# EAGLE board topshell2.1 (EAGLE 8.1.1)
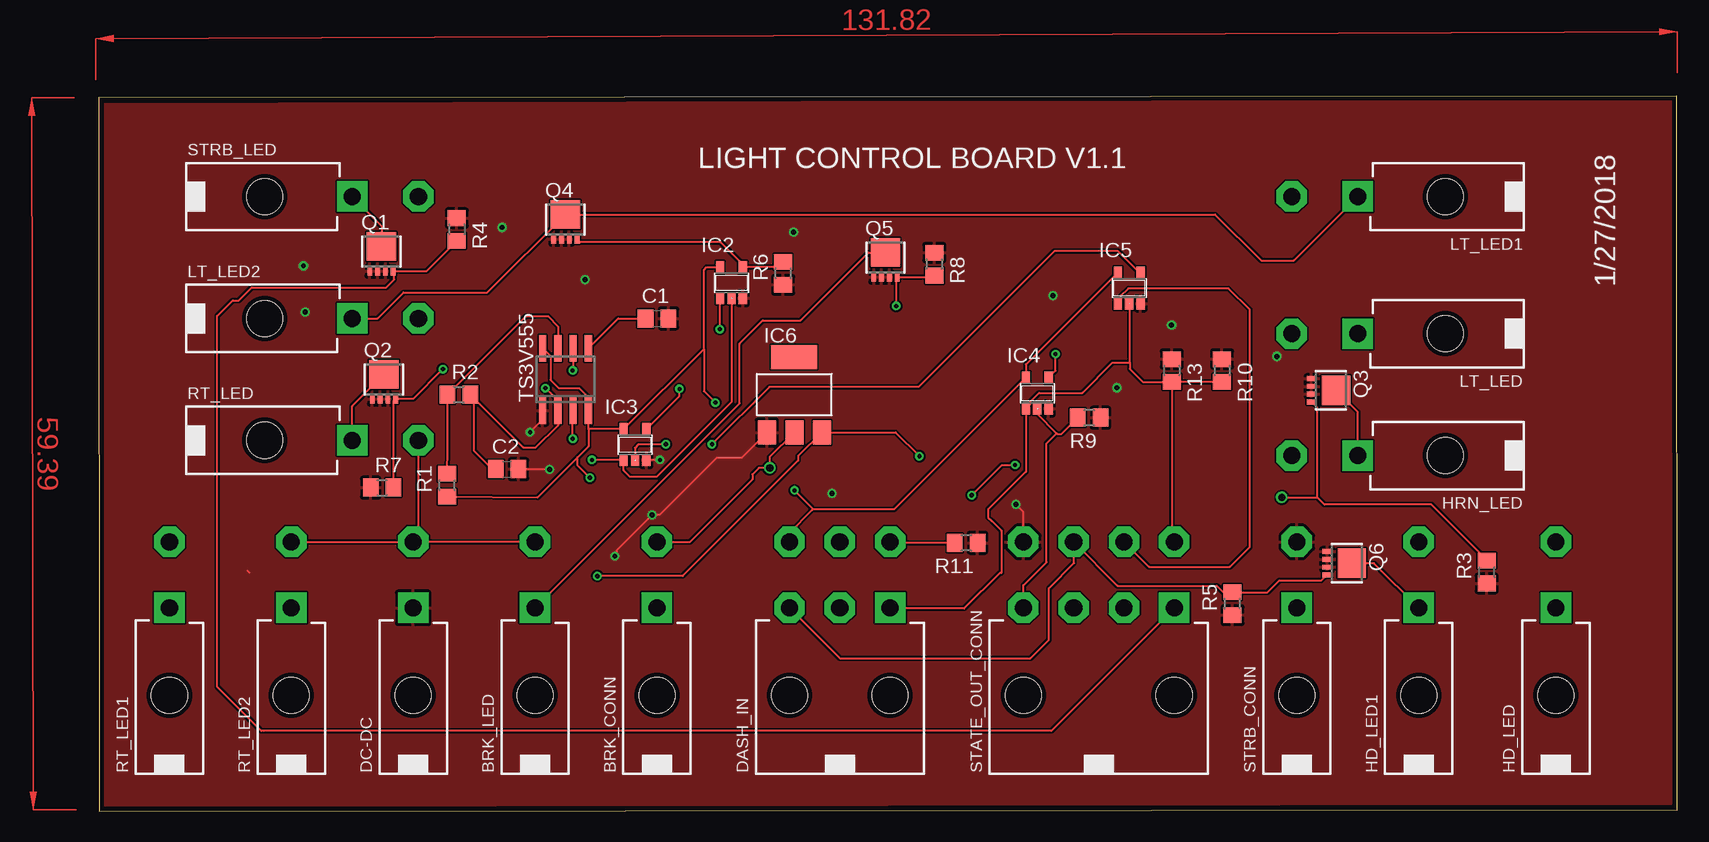
[diagram p0: board, top side]
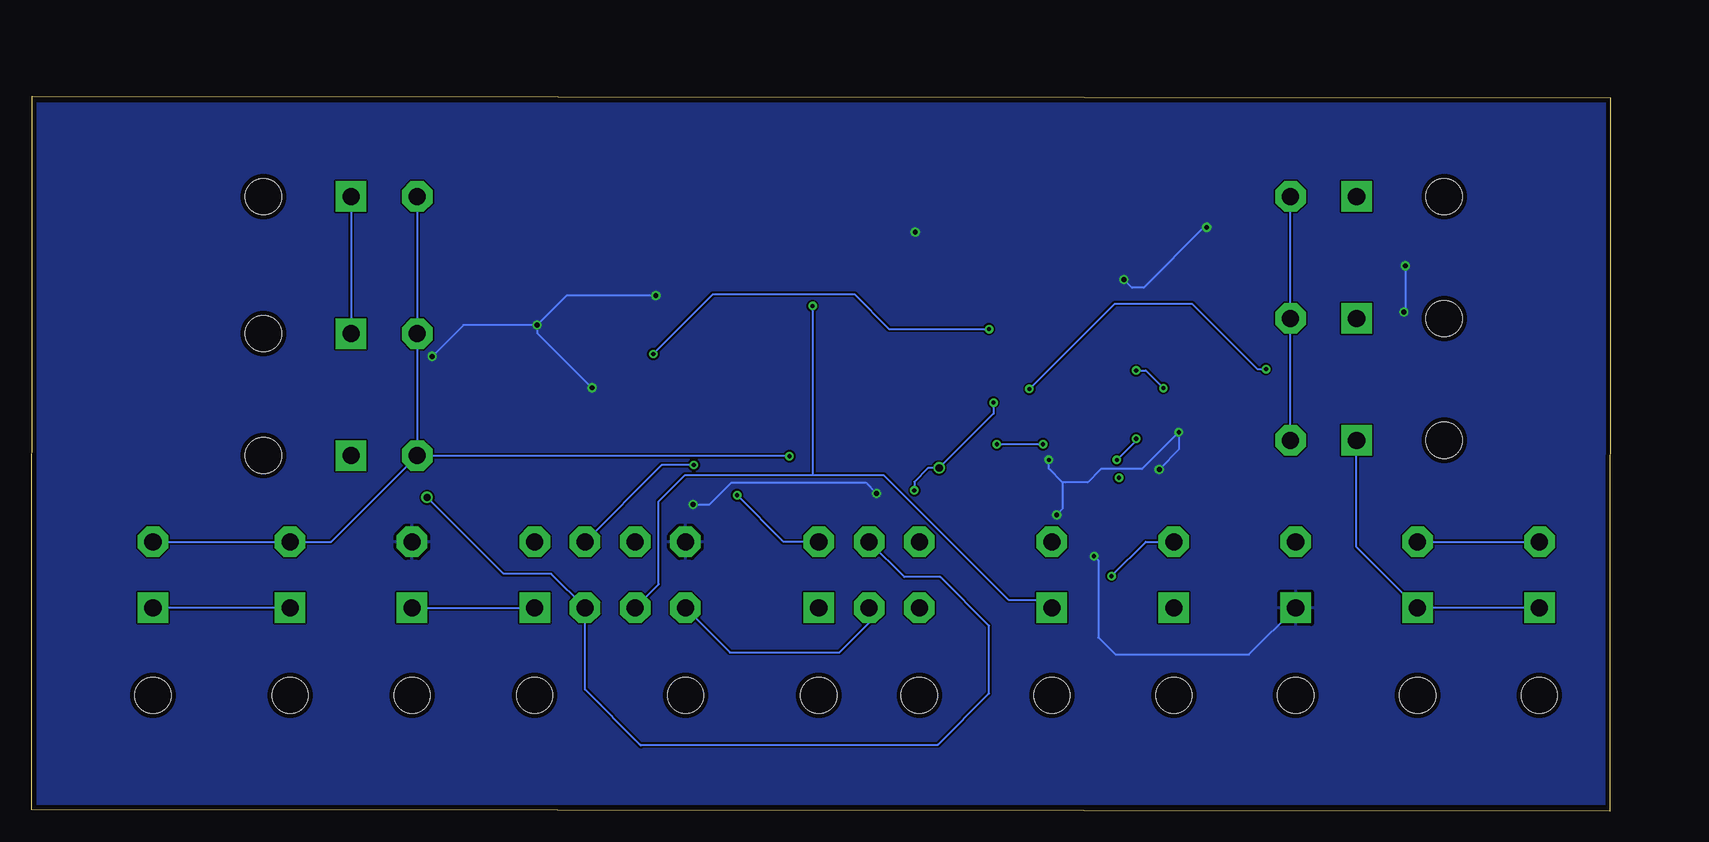
[diagram p1: board, bottom side, seen from below]

Size 131.59 x 59.64 mm. Coordinates in mm from the lower left corner, seen from the top.
Outline: 0.05,0 131.58,0.12 131.54,59.64 0,59.51 0.05,0
Copper layers (1*16): Top 0.0356mm / dielectric 1.5011mm / Bottom 0.0356mm
Design rules "LaenPCBOrder": minimum track width 6mil, minimum drill 13mil, track to track 6mil, track to pad 6mil, pad to pad 6mil, via to via 6mil, smd to smd 6mil, copper to edge 15mil, drill to drill 6mil, minimum pad ring 7mil, minimum via ring 7mil, stop-mask expansion 3mil, vias tented up to drill 0mil, thermal gap 10mil

## Footprints (pad centres in the part's own frame; a part is rotated, then mirrored left to right if it is on the bottom)
39-30-?02? = drill 1.422 pad 2.54 square: 1 0,0 | drill 1.422 pad 2.54 octagon: 2 0,5.512 | hole 3: 0,-7.3
C0805 = smd 1.3 x 1.5: 1 -0.95,0; 2 0.95,0
39-30-?06? = drill 1.422 pad 2.54 square: 1 4.191,0 | drill 1.422 pad 2.54 octagon: 2 0,0; 3 -4.191,0; 4 4.191,5.512; 5 0,5.512; 6 -4.191,5.512 | hole 3: -4.191,-7.3; 4.191,-7.3
SOT23-5 = smd 0.69 x 0.99: 1 -0.95,-1.29; 2 0,-1.29; 3 0.95,-1.29; 4 0.95,1.3; 5 -0.95,1.3
SOT223 = smd 1.499 x 2.007: 1 -2.261,-3.15; 2 0.025,-3.15; 3 2.311,-3.15 | smd 3.81 x 2.007: 4 0,3.15
LFPAK33 = smd 0.4 x 0.8: 1 -0.975,-1.625; 2 -0.325,-1.625; 3 0.325,-1.625; 4 0.975,-1.625 | smd 2.45 x 2.35: MB 0,0.425
R0805 = smd 1.3 x 1.5: 1 -0.95,0; 2 0.95,0
39-30-?08? = drill 1.422 pad 2.54 square: 1 6.287,0 | drill 1.422 pad 2.54 octagon: 2 2.095,0; 3 -2.095,0; 4 -6.287,0; 5 6.287,5.512; 6 2.095,5.512; 7 -2.095,5.512; 8 -6.287,5.512 | hole 3: -6.287,-7.3; 6.287,-7.3
SO08 = smd 0.6 x 2.2: 1 -1.905,-2.6; 2 -0.635,-2.6; 3 0.635,-2.6; 4 1.905,-2.6; 5 1.905,2.6; 6 0.635,2.6; 7 -0.635,2.6; 8 -1.905,2.6

## Placement (x,y rotation side)
BRK_CONN  39-30-02?  [39-30-?02?]  46.54,16.98 0 top
BRK_LED  39-30-02?  [39-30-?02?]  36.38,16.98 0 top
C1  10nF  [C0805]  46.54,41.11 0 top
C2  2.2uF  [C0805]  34.05,28.54 0 top
DASH_IN  39-30-06?  [39-30-?06?]  61.78,16.98 0 top
DC-DC  39-30-02?  [39-30-?02?]  26.22,16.98 0 top
HD_LED  39-30-02?  [39-30-?02?]  121.47,16.98 0 top
HD_LED1  39-30-02?  [39-30-?02?]  110.04,16.98 0 top
HRN_LED  39-30-02?  [39-30-?02?]  104.96,29.68 90 top
IC2  74AHC1G08DBV  [SOT23-5]  52.75,44.08 0 top
IC3  74AHC1G08DBV  [SOT23-5]  44.71,30.58 0 top
IC4  74AHC1G32DBV  [SOT23-5]  78.24,34.88 0 top
IC5  74AHC1G32DBV  [SOT23-5]  85.91,43.65 0 top
IC6  REG1117  [SOT223]  57.97,34.76 0 top
LT_LED  39-30-02?  [39-30-?02?]  104.96,39.84 90 top
LT_LED1  39-30-02?  [39-30-?02?]  104.96,51.27 90 top
LT_LED2  39-30-02?  [39-30-?02?]  21.14,41.11 270 top
Q1  PSMN013-30MLC  [LFPAK33]  23.58,46.69 0 top
Q2  PSMN013-30MLC  [LFPAK33]  23.79,36.03 0 top
Q3  PSMN013-30MLC  [LFPAK33]  102.73,35.13 270 top
Q4  PSMN013-30MLC  [LFPAK33]  38.91,49.36 0 top
Q5  PSMN013-30MLC  [LFPAK33]  65.59,46.19 0 top
Q6  PSMN013-30MLC  [LFPAK33]  104.03,20.7 270 top
R1  100K  [R0805]  29.04,27.21 90 top
R2  220K  [R0805]  30.03,34.76 0 top
R3  1K  [R0805]  115.71,19.97 90 top
R4  1K  [R0805]  29.85,48.53 270 top
R5  1K  [R0805]  94.51,17.33 90 top
R6  1K  [R0805]  57.07,44.87 90 top
R7  1K  [R0805]  23.63,27 0 top
R8  1K  [R0805]  69.66,45.64 270 top
R9  1K  [R0805]  82.57,32.83 180 top
R10  1K  [R0805]  93.64,36.77 270 top
R11  1K  [R0805]  72.32,22.4 180 top
R13  1K  [R0805]  89.44,36.77 270 top
RT_LED  39-30-02?  [39-30-?02?]  21.14,30.95 270 top
RT_LED1  39-30-02?  [39-30-?02?]  5.9,16.98 0 top
RT_LED2  39-30-02?  [39-30-?02?]  16.06,16.98 0 top
STATE_OUT_CONN  39-30-08?  [39-30-?08?]  83.37,16.98 0 top
STRB_CONN  39-30-02?  [39-30-?02?]  99.88,16.98 0 top
STRB_LED  39-30-02?  [39-30-?02?]  21.14,51.27 270 top
TS3V555  LM555D  [SO08]  38.92,36.03 0 top

## Library data of the parts
BRK_CONN BRK_LED DASH_IN DC-DC HD_LED HD_LED1 HRN_LED LT_LED LT_LED1 LT_LED2 RT_LED RT_LED1 RT_LED2 STATE_OUT_CONN STRB_CONN STRB_LED = con-molex-mini-fit
C1 C2 = eagle-ltspice; SPICEMODEL: NONE; SPICEPREFIX: C
IC2 IC3 = 74xx-little-us
IC4 IC5 = 74xx-little-de
IC6 = burr-brown; MPN: REG1117; OC_FARNELL: 1097566; OC_NEWARK: 14P6981
Q1-Q6 = transistor-power; MPN: PSMN013-30MLC; OC_FARNELL: 2115260; OC_NEWARK: 05W5709
R1-R11 R13 = rcl
TS3V555 = linear

## Nets
GND: C1.2 C2.2 DC-DC.1 IC2.3 IC3.3 IC4.3 IC5.3 IC6.1 Q1.1 Q1.2 Q1.3 Q2.1 Q2.2 Q2.3 Q3.1 Q3.2 Q3.3 Q4.1 Q4.2 Q4.3 Q5.1 Q5.2 Q5.3 Q6.1 Q6.2 Q6.3 R3.1 R4.1 R5.1 R6.1 R7.1 R8.1 R9.1 R10.1 R11.1 R13.1 STATE_OUT_CONN.8 STRB_CONN.2 TS3V555.1
N$1: R1.2 R2.1 TS3V555.7
N$2: Q1.MB STRB_LED.1
N$3: C2.1 R2.2 TS3V555.2 TS3V555.6
N$4: IC2.2 IC3.1 TS3V555.3
N$5: HRN_LED.1 Q3.MB
N$6: Q1.4 R4.2 STATE_OUT_CONN.1 STRB_CONN.1
N$7: DASH_IN.2 IC4.2 R9.2 STATE_OUT_CONN.4
N$8: DASH_IN.1 IC4.1 IC5.2 R10.2 R13.2 STATE_OUT_CONN.5
N$9: IC2.1 IC4.4
N$10: IC3.2 IC5.4
N$11: DASH_IN.4 IC5.1 R11.2 STATE_OUT_CONN.6
N$12: IC2.4 Q4.4 R6.2
N$13: IC3.4 Q2.4 R7.2
N$14: LT_LED1.1 LT_LED2.1 LT_LED.1 Q4.MB
N$15: Q2.MB RT_LED1.1 RT_LED2.1 RT_LED.1
N$16: BRK_LED.1 Q5.MB
N$17: HD_LED1.1 HD_LED.1 Q6.MB
N$19: DASH_IN.3 Q6.4 R5.2 STATE_OUT_CONN.7
N$20: DASH_IN.5 Q3.4 R3.2 STATE_OUT_CONN.2
N$23: BRK_CONN.1 Q5.4 R8.2 STATE_OUT_CONN.3
N$26: BRK_LED.2 DC-DC.2 HD_LED1.2 HD_LED.2 HRN_LED.2 IC6.3 LT_LED1.2 LT_LED2.2 LT_LED.2 RT_LED1.2 RT_LED2.2 RT_LED.2 STRB_LED.2
TS3V555: C1.1 TS3V555.5
VCC: BRK_CONN.2 DASH_IN.6 IC2.5 IC3.5 IC4.5 IC5.5 IC6.2 R1.1 TS3V555.4 TS3V555.8

## Tracks (layer width: path | path; a pad name or v marks a point on that pad's centre or on a via)
GND  (via drill 0.35, 0.41 pad 0.41)
  Top 0.152: TS3V555.1 37.01,32.69 v35.95,31.63 | v46.78,29.31 46.76,29.29 IC3.3 | IC6.1 53.58,29.49 51.52,29.49 46.76,24.73 v46.14,24.73 43.17,21.76 43.17,21.43 v43.02,21.28 | v37.59,28.53 35.01,28.53 C2.2 | STATE_OUT_CONN.8 77.08,24.99 v76.46,25.61 | 12.4,20.08 12.55,19.93
  Bottom 0.152: 45.64,27.45 43.54,27.45 42.44,28.55 39.03,28.55 v35.95,31.63 35.95,30.17 v37.59,28.53 | 45.64,27.45 46.78,28.59 v46.78,29.31 | v43.02,21.28 42.67,20.93 42.67,14.51 41.24,13.08 30.11,13.08 DC-DC.1 | 45.64,27.45 45.64,25.23 v46.14,24.73 | v17.07,45.49 17.07,41.77 v17.21,41.63 | v79.56,43.01 86.99,43.01 v89.44,40.57 | v89.44,40.57 89.44,39.89 v84.87,35.33 | v76.46,25.61 75.06,25.61 73.25,27.42 62.03,27.42 v61.14,26.53 | v89.44,40.57 95.58,40.57 v98.21,37.95 | v33.64,48.71 33.86,48.71 38.88,43.68 39.86,43.68 v40.54,44.36
  other vias: 57.93,48.32
  pour Top: 131.12,0.66 131.12,59.34 0.48,58.98 0.48,0.49
  pour Bottom: 0.37,59.03 131.13,59.03 131.13,0.64 0.37,0.64 0.37,59.02
N$1
  Top 0.152: R1.2 29.08,30.31 R2.1 35.61,41.29 37.44,41.29 38.28,40.45 TS3V555.7
N$2
  Top 0.152: STRB_LED.1 23.58,48.83 Q1.MB
N$3  (via drill 0.35)
  Top 0.152: TS3V555.6 39.55,36.82 v39.51,36.78 | v37.24,35.3 38.28,34.26 TS3V555.2 38.28,32.2 36.44,30.35 35.38,30.35 R2.2 31.3,34.44 31.3,30.05 33.02,28.34 C2.1
  Bottom 0.152: v39.51,36.78 38.72,36.78 v37.24,35.3
N$4  (via drill 0.35)
  Top 0.152: IC2.2 52.74,34.13 46.52,27.91 44.29,27.91 43.76,28.44 IC3.1 41.15,29.29 v41.13,29.31 | v39.51,31.08 39.51,33.38 TS3V555.3
  Bottom 0.152: v41.13,29.31 39.51,30.93 v39.51,31.08
N$5
  Top 0.152: HRN_LED.1 104.96,33.33 Q3.MB
N$6
  Top 0.152: 24.59,45.06 Q1.4 | 24.59,45.06 27.34,45.06 R4.2 | STATE_OUT_CONN.1 79.4,6.73 13.79,6.73 13.56,6.73 9.87,10.41 9.87,41.31 11.18,42.62 11.68,42.62 12.76,43.7 23.97,43.7 24.64,44.37 24.64,45.02 24.59,45.06
  Bottom 0.152: STRB_CONN.1 STATE_OUT_CONN.1
N$7
  Top 0.152: IC4.2 78.24,33.15 79.86,31.53 | 79.86,31.53 79.92,31.47 80.25,31.47 R9.2 | STATE_OUT_CONN.4 77.08,18.85 79.01,20.78 79.01,30.69 79.86,31.53
  Bottom 0.152: STATE_OUT_CONN.4 73.37,13.27 64.25,13.27 61.78,15.74 DASH_IN.2
N$8
  Top 0.152: R10.2 R13.2 | R13.2 87.04,35.82 85.96,36.9 85.96,37.43 | 85.96,37.43 85.96,42.31 IC5.2 | R13.2 89.44,22.7 STATE_OUT_CONN.5 | 85.96,37.43 84.52,37.43 82,34.91 78.39,34.91 77.66,34.18 77.66,33.96 IC4.1 77.29,28.3 77.26,28.3 74.14,25.18 74.14,24.53 74.46,24.21 75.24,23.43 75.24,19.89 75.11,19.89 72.14,16.92 66.02,16.92 DASH_IN.1
N$9  (via drill 0.35)
  Top 0.152: IC4.4 79.77,36.76 v79.77,38.14 | v51.77,40.22 51.8,40.25 IC2.1
  Bottom 0.152: v79.77,38.14 74.78,43.13 63.01,43.13 60.1,40.22 v51.77,40.22
N$10  (via drill 0.35)
  Top 0.152: v47.28,30.62 47.24,30.59 44.98,30.59 44.71,30.32 IC3.2 | IC5.4 86.74,44.95 84.98,46.72 79.65,46.72 68.34,35.4 55.9,35.4 v51.12,30.62
  Bottom 0.152: v51.12,30.62 v47.28,30.62
N$11  (via drill 0.35)
  Top 0.152: STATE_OUT_CONN.6 87.56,20.39 94.29,20.39 95.96,22.06 95.96,41.85 94.19,43.62 85.83,43.62 85.19,42.98 85.19,42.59 IC5.1 | v72.78,26.37 75.3,28.89 v76.39,28.89 | R11.2 66.07,22.39 DASH_IN.4
  Bottom 0.152: DASH_IN.4 68.9,22.49 v72.78,26.37 | v76.39,28.89 79.06,28.89 STATE_OUT_CONN.6
N$12
  Top 0.152: R6.2 56.63,45.38 IC2.4 53.7,45.61 51.83,47.47 40.14,47.47 Q4.4
N$13  (via drill 0.35)
  Top 0.152: R7.2 24.58,34.22 Q2.4 26.21,34.41 v28.68,36.88 | IC3.4 48.41,34.63 v48.41,35.23
  Bottom 0.152: v48.41,35.23 41.29,42.35 34.87,42.35 29.41,36.88 v28.68,36.88
N$14
  Top 0.152: LT_LED2.1 23.25,41.11 25.42,43.28 32.4,43.28 Q4.MB 93.05,49.78 96.9,45.94 99.62,45.94 LT_LED1.1
  Bottom 0.152: LT_LED1.1 LT_LED.1
N$15
  Top 0.152: RT_LED.1 21.14,33.81 Q2.MB
  Bottom 0.152: 16.23,17.15 RT_LED2.1 | 16.23,17.15 21.14,22.06 RT_LED.1 | RT_LED1.1 RT_LED2.1 | RT_LED2.1 16.23,17.15
N$16
  Top 0.152: BRK_LED.1 53.42,34.03 53.42,39.02 55.35,40.94 58.49,40.94 64.16,46.61 Q5.MB
N$17
  Top 0.152: HD_LED1.1 106.31,20.7 Q6.MB
  Bottom 0.152: HD_LED1.1 HD_LED.1
N$19
  Top 0.152: 81.3,22.46 STATE_OUT_CONN.7 | 81.3,22.46 84.93,18.83 93.2,18.83 93.76,18.27 R5.2 97.44,18.27 98.41,19.25 101.92,19.25 Q6.4 | DASH_IN.3 61.78,12.79 77.66,12.79 79.2,14.33 79.2,18.61 81.3,20.71 81.3,22.46
N$20  (via drill 0.6)
  Top 0.152: R3.2 115.71,20.98 111.09,25.6 102.19,25.6 101.59,26.2 | 101.59,26.2 101.59,33.67 Q3.4 | v98.63,26.19 101.58,26.19 101.59,26.2
  Bottom 0.152: 80.86,5.56 85.46,10.16 STATE_OUT_CONN.2 85.46,17.01 88.27,19.82 92.25,19.82 v98.63,26.19 | 80.86,5.56 80.79,5.49 | 80.86,5.56 56.05,5.56 51.77,9.84 51.77,15.48 55.84,19.54 58.83,19.54 DASH_IN.5
N$23  (via drill 0.35)
  Top 0.152: 66.64,44.56 Q5.4 | 66.64,44.56 69.54,44.56 R8.2 | v66.49,42.15 66.49,44.41 66.64,44.56
  Bottom 0.152: STATE_OUT_CONN.3 79.31,18.95 79.31,25.86 77.13,28.04 66.59,28.04 | 66.59,28.04 66.44,28.04 66.44,42.11 v66.49,42.15 | 66.59,28.04 60.56,28.04 50.15,17.64 47.2,17.64 BRK_CONN.1
N$26  (via drill 0.35)
  Top 0.152: RT_LED2.2 DC-DC.2 26.65,22.92 | RT_LED.2 26.65,22.92 | BRK_LED.2 27.08,22.49 26.65,22.92 | v41.56,19.63 48.67,19.63 58.3,29.25 58.3,29.63 IC6.3 66.43,31.61 v68.42,29.62
  Bottom 0.152: RT_LED.2 LT_LED2.2 STRB_LED.2 | HD_LED.2 HD_LED1.2 106.63,22.49 99.68,29.45 99.62,29.5 99.5,29.62 | LT_LED1.2 LT_LED.2 HRN_LED.2 99.5,29.62 | v41.56,19.63 38.7,22.49 BRK_LED.2 | v68.42,29.62 99.5,29.62 | RT_LED2.2 RT_LED1.2
TS3V555
  Top 0.152: TS3V555.5 43.3,41.11 C1.1
VCC  (via drill 0.35, 0.6)
  Top 0.152: IC5.5 77.29,37.28 IC4.5 66.31,25.2 59.54,25.2 59.47,25.13 | 59.47,25.13 57.59,23.24 DASH_IN.6 | 50.46,38.58 IC3.5 40.83,31.88 40.82,31.89 | 50.46,38.58 50.46,45.16 50.68,45.38 IC2.5 | 50.46,38.58 50.46,35.04 v51.4,34.1 | v58,26.77 59.47,25.3 59.47,25.13 | BRK_CONN.2 49.3,22.49 54.5,27.7 54.5,28.12 55.03,28.65 v55.94,28.65 55.94,29.55 IC6.2 | R1.1 36.57,26.19 39.9,29.52 | 40.82,31.89 TS3V555.4 40.82,34.53 40.05,35.31 38.36,35.31 37.67,35.99 37.67,37.97 TS3V555.8 | 40.82,31.89 40.82,30.44 39.9,29.52 | v40.94,27.82 39.9,28.87 39.9,29.52
  Bottom 0.152: v58,26.77 58,27.5 56.85,28.65 v55.94,28.65 51.4,33.18 v51.4,34.1 | 41.21,27.82 v40.94,27.82
(copper drawn outside any net)
  shapes: Top area x2

## Text on the board
tPlace: LIGHT CONTROL BOARD V1.1 | 1/27/2018